# EAGLE board CM_Prototype (EAGLE 9.6.2)
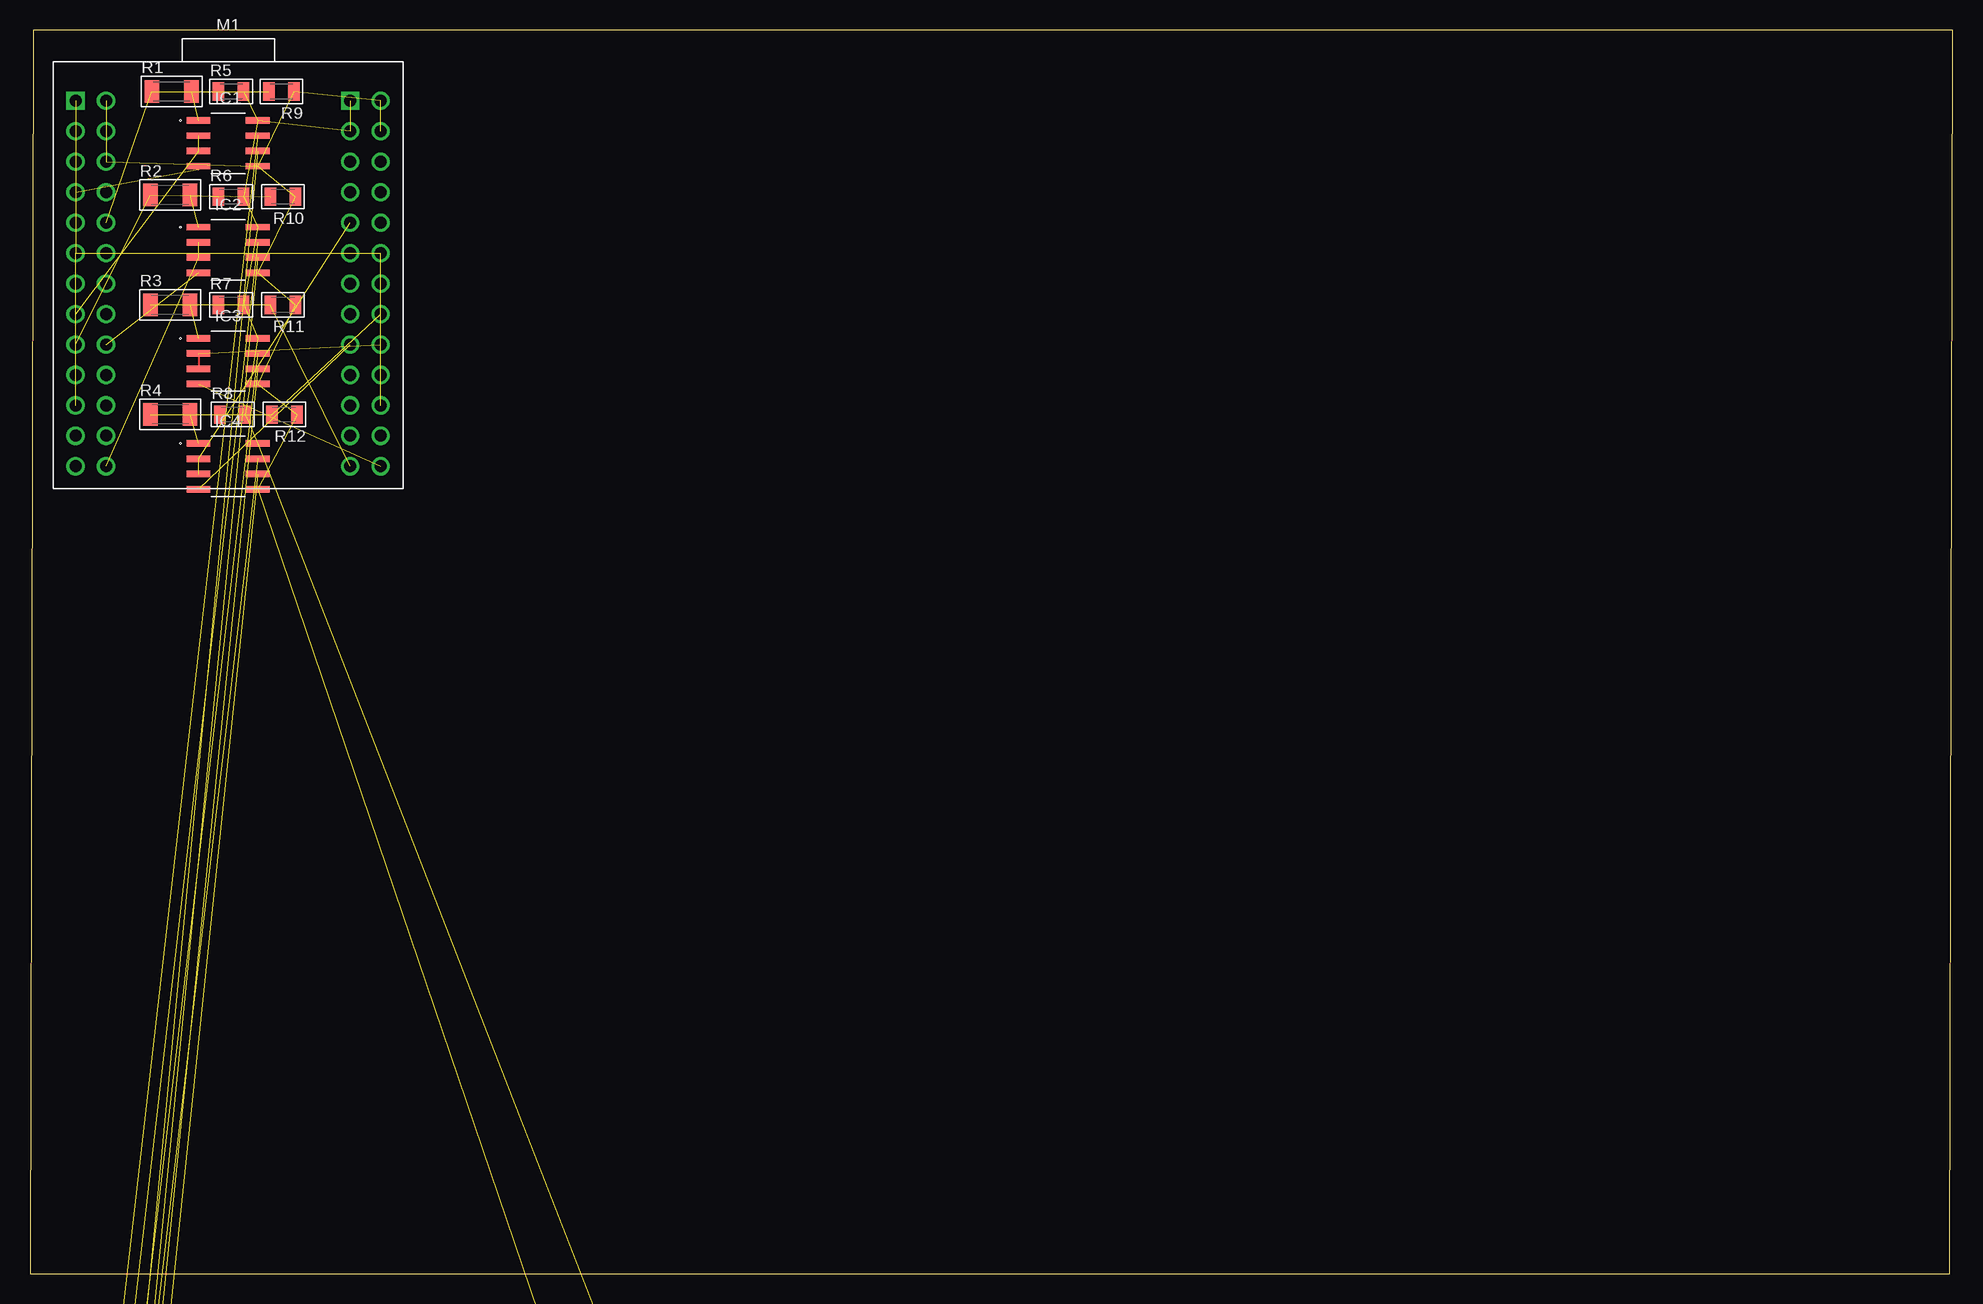
[diagram p0: board, top side]

Size 160.25 x 103.68 mm. Coordinates in mm from the lower left corner, seen from the top.
Outline: 0,0 160,0 160.25,103.68 0.25,103.68 0,0
Copper layers (1*16): Top 0.035mm / dielectric 1.5mm / Bottom 0.035mm
Design rules "default": minimum track width 6mil, minimum drill 0.35mm, track to track 6mil, track to pad 6mil, pad to pad 6mil, via to via 6mil, smd to smd 6mil, copper to edge 40mil, drill to drill 6mil, minimum pad ring 10mil, minimum via ring 8mil, stop-mask expansion 4mil, vias tented up to drill 0mil, thermal gap 10mil

## Footprints (pad centres in the part's own frame; a part is rotated, then mirrored left to right if it is on the bottom)
ADM3078E = smd 1.981 x 0.533: 1 -2.464,1.905; 2 -2.464,0.635; 3 -2.464,-0.635; 4 -2.464,-1.905; 5 2.464,-1.905; 6 2.464,-0.635; 7 2.464,0.635; 8 2.464,1.905
5267-3 = drill 1: 1 0,0; 2 -2.54,0; 3 -5.08,0
5267-4 = drill 1: 1 0,0; 2 -2.54,0; 3 -5.08,0; 4 -7.62,0
FT4232H_MINI_MODULE = drill 1 square: CN2-1 -12.715,16.51; CN3-1 10.175,16.51 | drill 1: CN2-2 -10.175,16.51; CN2-3 -12.715,13.97; CN2-4 -10.175,13.97; CN2-5 -12.715,11.43; CN2-6 -10.175,11.43; CN2-7 -12.715,8.89; CN2-8 -10.175,8.89; CN2-9 -12.715,6.35; CN2-10 -10.175,6.35; CN2-11 -12.715,3.81; CN2-12 -10.175,3.81; CN2-13 -12.715,1.27; CN2-14 -10.175,1.27; CN2-15 -12.715,-1.27; CN2-16 -10.175,-1.27; CN2-17 -12.715,-3.81; CN2-18 -10.175,-3.81; CN2-19 -12.715,-6.35; CN2-20 -10.175,-6.35; CN2-21 -12.715,-8.89; CN2-22 -10.175,-8.89; CN2-23 -12.715,-11.43; CN2-24 -10.175,-11.43; CN2-25 -12.715,-13.97; CN2-26 -10.175,-13.97; CN3-2 12.715,16.5; CN3-3 10.175,13.97; CN3-4 12.715,13.97; CN3-5 10.175,11.43; CN3-6 12.715,11.43; CN3-7 10.175,8.89; CN3-8 12.715,8.89; CN3-9 10.175,6.35; CN3-10 12.715,6.35; CN3-11 10.175,3.81; CN3-12 12.715,3.81; CN3-13 10.175,1.27; CN3-14 12.715,1.27; CN3-15 10.175,-1.27; CN3-16 12.715,-1.27; CN3-17 10.175,-3.81; CN3-18 12.715,-3.81; CN3-19 10.175,-6.35; CN3-20 12.715,-6.35; CN3-21 10.175,-8.89; CN3-22 12.715,-8.89; CN3-23 10.175,-11.43; CN3-24 12.715,-11.43; CN3-25 10.175,-13.97; CN3-26 12.715,-13.97
1206 = smd 1.219 x 1.88: 1 -1.651,0; 2 1.651,0
0805 = smd 0.965 x 1.524: 1 -1.041,0; 2 1.041,0
CONV_BOB-12009 = drill 1.016: GND_1 5.08,-1.27; GND_2 -5.08,-1.27; HV 5.08,1.27; HV2 5.08,3.81; HV3 5.08,-3.81; HV4 5.08,-6.35; LV -5.08,1.27; LV2 -5.08,3.81; LV3 -5.08,-3.81; LV4 -5.08,-6.35 | drill 1.016 square: HV1 5.08,6.35; LV1 -5.08,6.35
ESP32-DEVKITV1 = drill 1 pad 1.93: 1 -22.87,-13.54; 2 -20.33,-13.54; 3 -17.79,-13.54; 4 -15.25,-13.54; 5 -12.71,-13.54; 6 -10.17,-13.54; 7 -7.63,-13.54; 8 -5.09,-13.54; 9 -2.55,-13.54; 10 -0.01,-13.54; 11 2.53,-13.54; 12 5.07,-13.54; 13 7.61,-13.54; 14 10.15,-13.54; 15 12.69,-13.54; 16 12.69,11.23; 17 10.15,11.23; 18 7.61,11.23; 19 5.07,11.23; 20 2.53,11.23; 21 -0.01,11.23; 22 -2.55,11.23; 23 -5.09,11.23; 24 -7.63,11.23; 25 -10.17,11.23; 26 -12.71,11.23; 27 -15.25,11.23; 28 -17.79,11.23; 29 -20.33,11.23; 30 -22.87,11.23

## Placement (x,y rotation side)
IC1  ADM3078E  [ADM3078E]  16.51,94.23 0 top
IC2  ADM3078E  [ADM3078E]  16.51,85.34 0 top
IC3  ADM3078E  [ADM3078E]  16.51,76.07 0 top
IC4  ADM3078E  [ADM3078E]  16.51,67.31 0 top
IC5  ADM3078E  [ADM3078E]  -23.88,-106.55 0 top  (outside the outline)
J1  22-03-5035  [5267-3]  -81.79,-122.81 0 top  (outside the outline)
J2  22-03-5035  [5267-3]  -81.79,-126.11 0 top  (outside the outline)
J3  22-03-5035  [5267-3]  -81.79,-129.41 0 top  (outside the outline)
J4  22-03-5035  [5267-3]  -81.79,-132.72 0 top  (outside the outline)
J5  22-03-5045  [5267-4]  -79.25,-136.02 0 top  (outside the outline)
J6  22-03-5045  [5267-4]  -79.25,-139.32 0 top  (outside the outline)
J7  22-03-5045  [5267-4]  -79.25,-142.62 0 top  (outside the outline)
J8  22-03-5045  [5267-4]  -79.25,-145.92 0 top  (outside the outline)
M1  FT4232H_MINI_MODULE  [FT4232H_MINI_MODULE]  16.51,81.28 0 top
R1  [1206]  11.81,98.55 0 top
R2  [1206]  11.68,89.92 0 top
R3  [1206]  11.68,80.77 0 top
R4  [1206]  11.68,71.63 0 top
R5  [0805]  16.76,98.55 0 top
R6  [0805]  16.76,89.79 0 top
R7  [0805]  16.76,80.77 0 top
R8  [0805]  16.89,71.63 0 top
R9  [0805]  20.95,98.55 180 top
R10  [0805]  21.08,89.79 180 top
R11  [0805]  21.08,80.77 180 top
R12  [0805]  21.21,71.63 180 top
R13  [0805]  2.54,-57.4 0 top  (outside the outline)
R14  [0805]  2.54,-61.34 0 top  (outside the outline)
R15  [0805]  2.54,-65.28 0 top  (outside the outline)
R16  [0805]  2.54,-69.22 0 top  (outside the outline)
R17  [0805]  2.54,-73.15 0 top  (outside the outline)
R18  [0805]  2.54,-77.09 0 top  (outside the outline)
R19  [0805]  2.54,-81.03 0 top  (outside the outline)
R20  [0805]  2.54,-84.96 0 top  (outside the outline)
R21  [0805]  2.54,-88.9 0 top  (outside the outline)
R22  [0805]  2.54,-92.84 0 top  (outside the outline)
R23  [0805]  2.54,-96.77 0 top  (outside the outline)
R24  [0805]  2.54,-100.71 0 top  (outside the outline)
R25  [0805]  -25.4,-111.89 0 top  (outside the outline)
R26  [0805]  -25.4,-115.82 0 top  (outside the outline)
R27  [0805]  -25.4,-119.76 0 top  (outside the outline)
R28  [1206]  -30.99,-117.73 0 top  (outside the outline)
R29  [1206]  -37.08,-117.73 0 top  (outside the outline)
R30  [1206]  -43.18,-117.73 0 top  (outside the outline)
R31  [1206]  -49.28,-117.73 0 top  (outside the outline)
R32  [1206]  -55.37,-117.73 0 top  (outside the outline)
R33  [1206]  -61.47,-117.73 0 top  (outside the outline)
R34  [1206]  -67.56,-117.73 0 top  (outside the outline)
R35  [1206]  -73.66,-117.73 0 top  (outside the outline)
R36  [1206]  -79.76,-117.73 0 top  (outside the outline)
R37  [1206]  -85.85,-117.73 0 top  (outside the outline)
U2  BOB-12009  [CONV_BOB-12009]  -20.95,-91.57 0 top  (outside the outline)
U$1  ESP32DEVKITV1  [ESP32-DEVKITV1]  78.74,-36.83 0 top  (outside the outline)

## Library data of the parts
IC1-IC5 = ADM3078E
J1-J8 = molex
M1 = FT4232H_MINI_MODULE
R1-R37 = RHD2000_eval_board
U2 = BOB-12009; AVAILABILITY: In Stock; DESCRIPTION: BSS138 Logic-Level Translator Interface Evaluation Board; MF: SparkFun; MP: BOB-12009; PACKAGE: None; PRICE: None; PURCHASE-URL: https://pricing.snapeda.com/search/part/BOB-12009/?ref=eda
U$1 = ESP32-DEVKITV1

## Nets
3V3: U2.LV U$1.1
485_ESP_N: IC5.7 R25.1 R26.2 R28.1
485_ESP_P: IC5.6 R27.1 R29.1
485_N1: IC1.7 R13.1 R14.2 R30.2
485_N2: IC2.7 R15.1 R16.2 R34.2
485_N3: IC3.7 R17.1 R18.2 R32.2
485_N4: IC4.7 R19.1 R20.2 R36.1
485_P1: IC1.6 R21.1 R31.2
485_P2: IC2.6 R22.1 R35.2
485_P3: IC3.6 R23.1 R33.2
485_P4: IC4.6 R24.1 R37.1
DIR_3V3: U2.LV3 U$1.8
DIR_5V: IC5.2 IC5.3 U2.HV3
DXL_N1: J5.4 R28.2 R30.1
DXL_N2: J6.4 R34.1
DXL_N3: J7.4 R32.1
DXL_N4: J8.4 R36.2
DXL_P1: J1.3 J5.3 R29.2 R31.1
DXL_P2: J2.3 J6.3 R35.1
DXL_P3: J3.3 J7.3 R33.1
DXL_P4: J4.3 J8.3 R37.2
GND: IC1.5 IC2.5 IC3.5 IC4.5 IC5.5 J1.1 J2.1 J3.1 J4.1 J5.1 J6.1 J7.1 J8.1 M1.CN2-2 M1.CN2-4 M1.CN2-6 M1.CN3-2 M1.CN3-4 R9.1 R10.1 R11.1 R12.1 R14.1 R16.1 R18.1 R20.1 R26.1 U2.GND_1 U2.GND_2 U$1.2
N$1: IC1.2 IC1.3 M1.CN2-15
N$2: IC2.2 IC2.3 M1.CN2-26
N$3: IC3.2 IC3.3 M1.CN3-18
N$4: IC4.2 IC4.3 M1.CN3-9
N$5: M1.CN2-10 R1.1 R9.2
N$6: IC1.1 R1.2 R5.1
N$7: M1.CN2-17 R2.1 R10.2
N$8: IC2.1 R2.2 R6.1
N$9: IC3.1 R3.2 R7.1
N$10: M1.CN3-25 R3.1 R11.2
N$11: M1.CN3-16 R4.1 R12.2
N$12: IC4.1 R4.2 R8.1
N$13: IC1.4 M1.CN2-7
N$14: IC2.4 M1.CN2-18
N$15: IC3.4 M1.CN3-26
N$16: IC4.4 M1.CN3-17
N$21: M1.CN2-1 M1.CN2-3 M1.CN2-5 M1.CN2-11 M1.CN2-21 M1.CN3-12 M1.CN3-22
RX_3V3: U2.LV2 U$1.12
RX_5V: IC5.1 U2.HV2
TX_3V3: U2.LV1 U$1.13
TX_5V: IC5.4 U2.HV1
VCC: IC1.8 IC2.8 IC3.8 IC4.8 IC5.8 M1.CN3-1 M1.CN3-3 R5.2 R6.2 R7.2 R8.2 R13.2 R15.2 R17.2 R19.2 R21.2 R22.2 R23.2 R24.2 R25.2 R27.2 U2.HV U$1.30
VDD: J1.2 J2.2 J3.2 J4.2 J5.2 J6.2 J7.2 J8.2

## Tracks (layer width: path | path; a pad name or v marks a point on that pad's centre or on a via)
3V3  (1 unrouted)
485_ESP_N  (3 unrouted)
485_ESP_P  (2 unrouted)
485_N1  (3 unrouted)
485_N2  (3 unrouted)
485_N3  (3 unrouted)
485_N4  (3 unrouted)
485_P1  (2 unrouted)
485_P2  (2 unrouted)
485_P3  (2 unrouted)
485_P4  (2 unrouted)
DIR_3V3  (1 unrouted)
DIR_5V  (2 unrouted)
DXL_N1  (2 unrouted)
DXL_N2  (1 unrouted)
DXL_N3  (1 unrouted)
DXL_N4  (1 unrouted)
DXL_P1  (3 unrouted)
DXL_P2  (2 unrouted)
DXL_P3  (2 unrouted)
DXL_P4  (2 unrouted)
GND  (29 unrouted)
N$1  (2 unrouted)
N$2  (2 unrouted)
N$3  (1 unrouted)
  Top 0.152: IC3.2 IC3.3
N$4  (2 unrouted)
N$5  (2 unrouted)
N$6  (2 unrouted)
N$7  (2 unrouted)
N$8  (2 unrouted)
N$9  (2 unrouted)
N$10  (2 unrouted)
N$11  (2 unrouted)
N$12  (2 unrouted)
N$13  (1 unrouted)
  Top 0.152: 14.05,92.08 IC1.4
N$14  (1 unrouted)
N$15  (1 unrouted)
N$16  (1 unrouted)
N$21  (6 unrouted)
  Top 0.152: M1.CN3-12 29.84,85.09 | 3.3,85.09 M1.CN2-11 | 3.67,72.26 M1.CN2-21
RX_3V3  (1 unrouted)
RX_5V  (1 unrouted)
TX_3V3  (1 unrouted)
TX_5V  (1 unrouted)
VCC  (22 unrouted)
  Top 0.152: 26.67,95.25 M1.CN3-3 | M1.CN3-1 26.67,97.78
VDD  (7 unrouted)